# EAGLE board spikershield4.pcb (EAGLE 7.4.0)
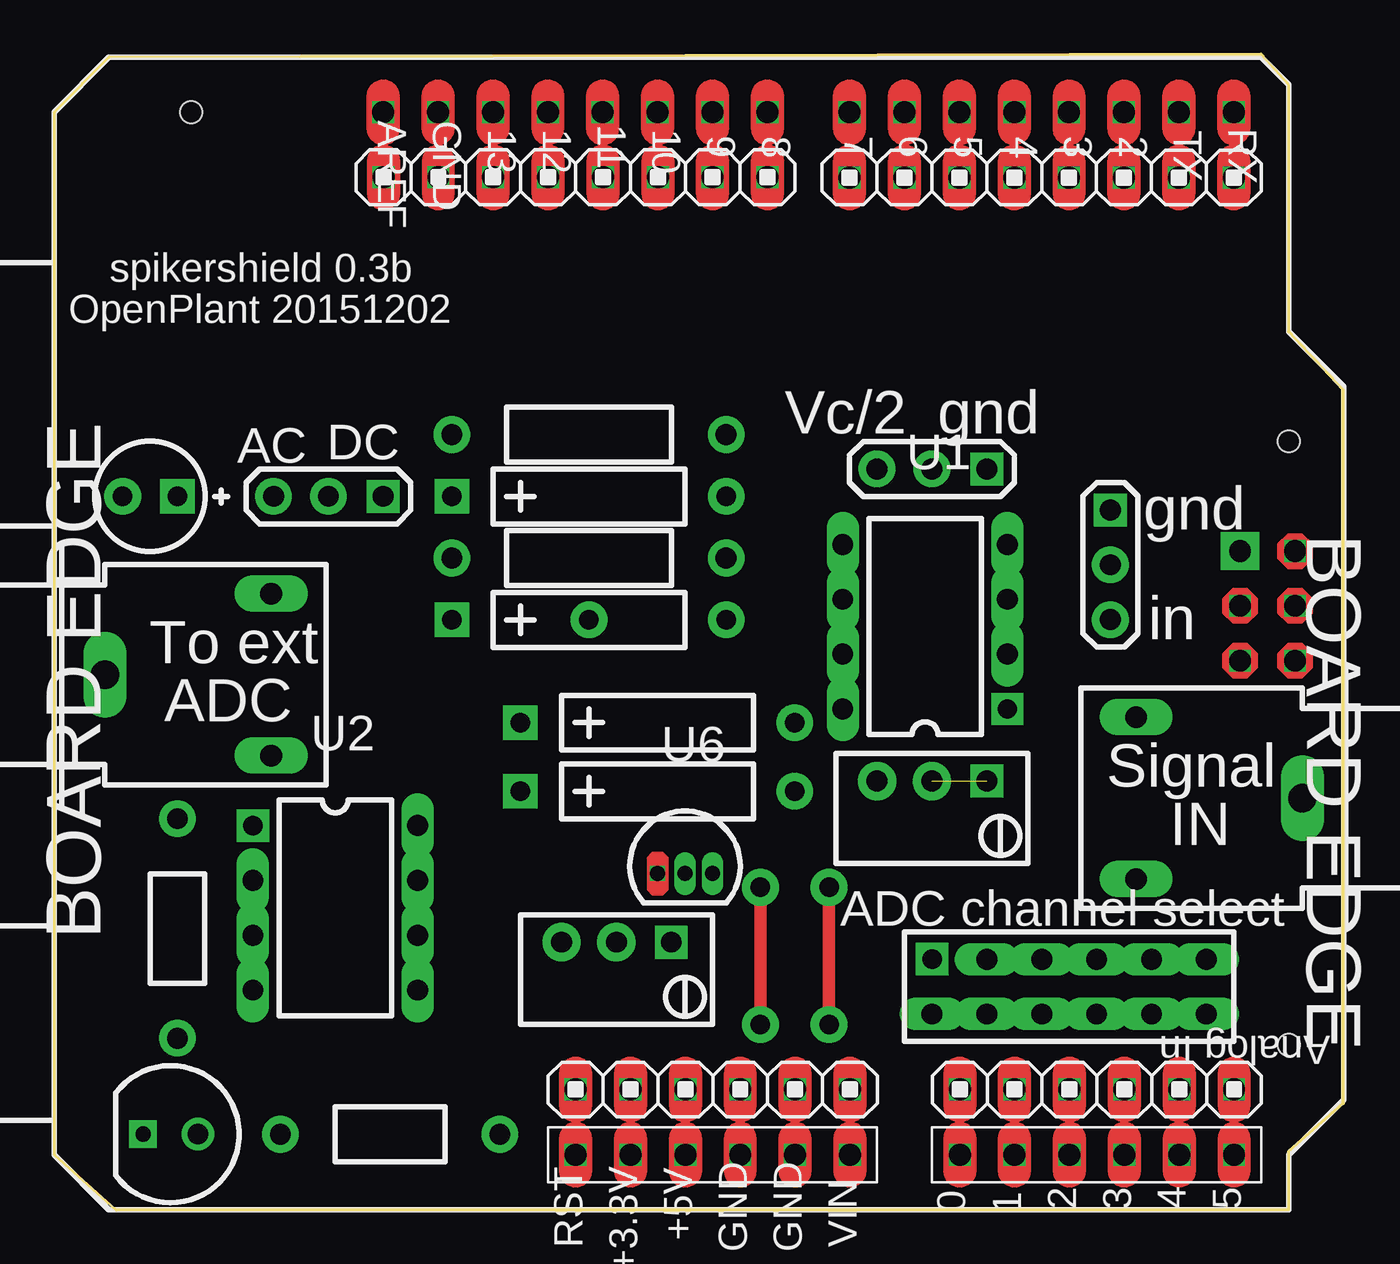
[diagram p0: board, top side]
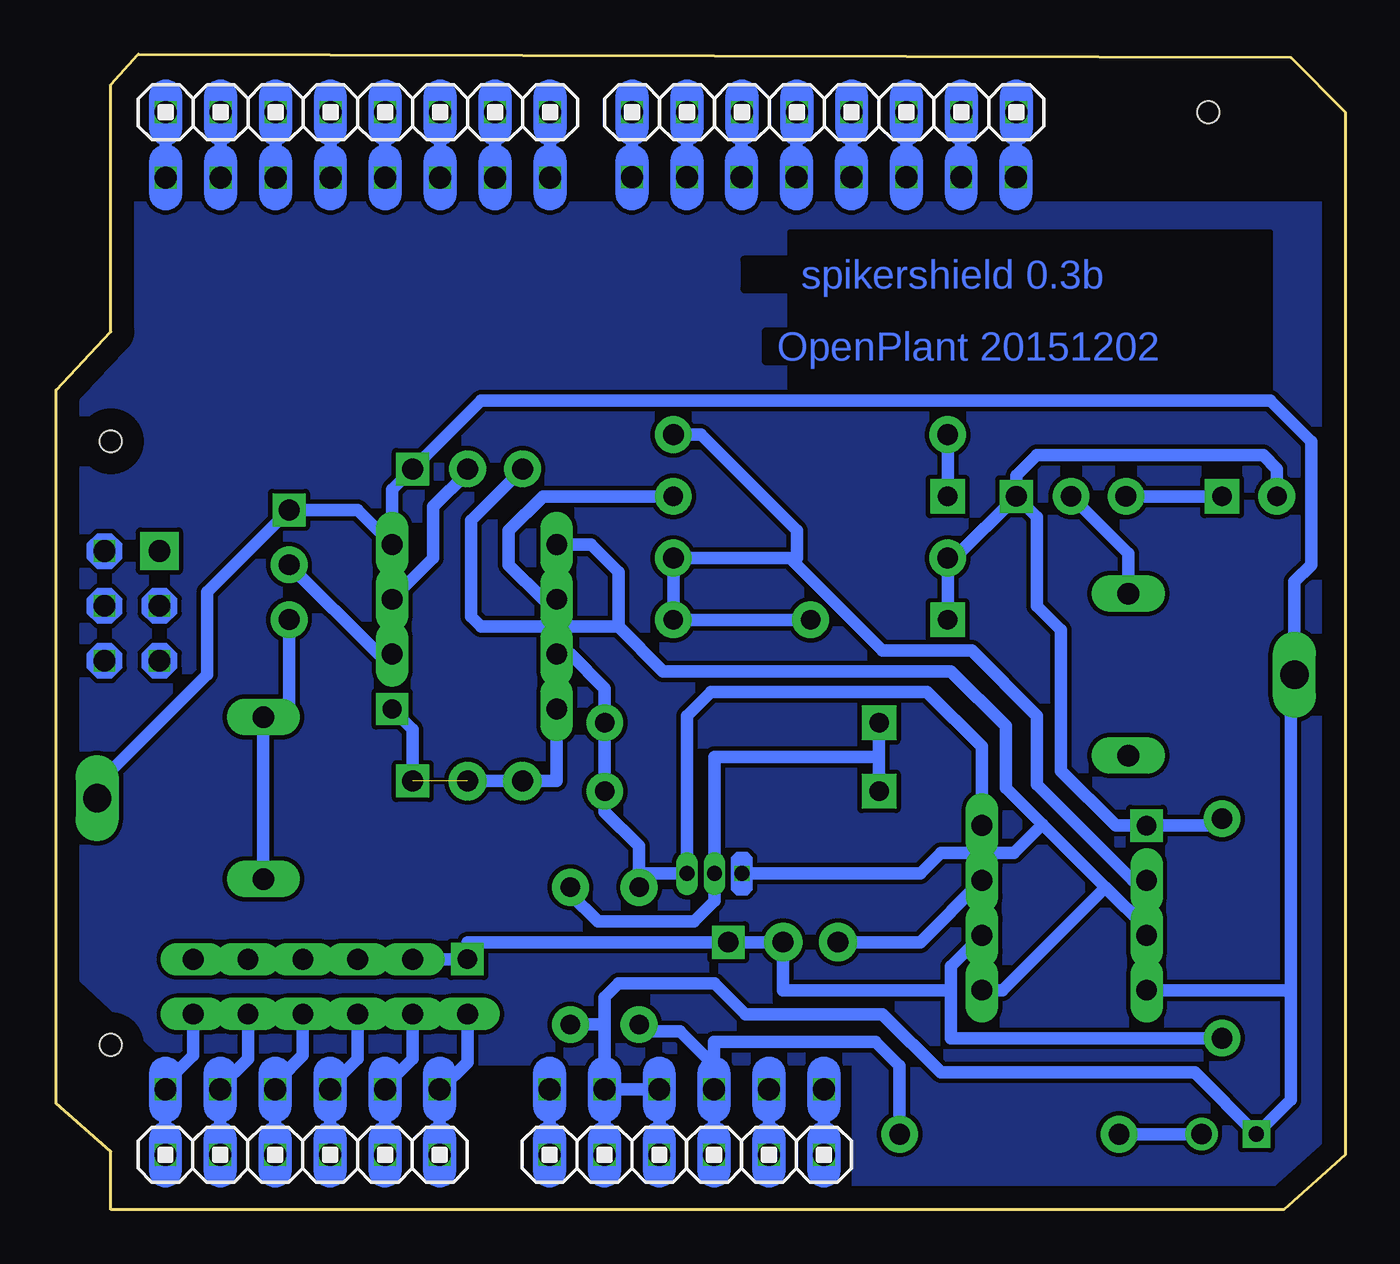
[diagram p1: board, bottom side, seen from below]

Size 59.69 x 53.5 mm. Coordinates in mm from the lower left corner, seen from the top.
Outline: 2.54,53.34 0,50.8 0,2.54 2.86,0 57.15,0 57.15,2.7 59.69,4.92 59.69,37.94 57.15,40.64 57.15,52.07 55.88,53.5 2.54,53.34
Copper layers (1*16): Top 0.035mm / dielectric 1.5mm / Bottom 0.035mm
Design rules "spikershield4": minimum track width 10mil, minimum drill 24mil, track to track 8mil, track to pad 8mil, pad to pad 8mil, via to via 8mil, smd to smd 8mil, copper to edge 40mil, drill to drill 8mil, minimum pad ring 0mil, minimum via ring 0mil, stop-mask expansion 4mil, vias tented up to drill 0mil, thermal gap 10mil

## Footprints (pad centres in the part's own frame; a part is rotated, then mirrored left to right if it is on the bottom)
CAP500AP_0PRIMARY = drill 0.9 pad 1.7: 1 6.325,0 | drill 0.9 pad 1.6 square: 2 -6.375,0
CAP100RP_1PRIMARY = drill 0.9 pad 1.6 square: 1 -0.74,0 | drill 0.9 pad 1.7: 2 1.8,0
LED_2PRIMARY = drill 0.95 pad 1.5: 1 0.952,0 | drill 0.711 pad 1.27 square: 2 -1.588,0
COMP_3PRIMARY = hole 1: 0,0
COMP_4PRIMARY = hole 1: 0,0
COMP_5PRIMARY = hole 1: 0,0
1X08_6PRIMARY = drill 1.016 pad 0.762 square: 1 -8.89,0; 2 -6.35,0; 3 -3.81,0; 4 -1.27,0; 5 1.27,0; 6 3.81,0; 7 6.35,0; 8 8.89,0
JUMPER_3_7PRIMARY = drill 0.965 pad 1.524 square: 1 -2.54,0 | drill 0.965 pad 1.7: 2 0,0; 3 2.54,0
RCA_JACK_8PRIMARY = drill 1.3 pad 2 long: 1 -0.365,0 | drill 1 pad 1.7 long: 2 7.325,3.75; 3 7.325,-3.75
1X06_9PRIMARY = drill 1.016 pad 0.762 square: 1 -6.35,0; 2 -3.81,0; 3 -1.27,0; 4 1.27,0; 5 3.81,0; 6 6.35,0
COMP_10PRIMARY = drill 1 pad 0.821 square: 1 0,0
COMP_11PRIMARY = drill 1 pad 0.821 square: 1 0,0
COMP_12PRIMARY = drill 1 pad 1.778 square: 1 0,0
COMP_13PRIMARY = drill 1 pad 0.821 square: 1 0,0
COMP_14PRIMARY = drill 1 pad 0.821 square: 1 0,0
COMP_15PRIMARY = drill 1 pad 0.821 square: 1 0,0
PAD_16PRIMARY = drill 0.9 pad 1.7: 1 0,0
1X06_17PRIMARY = drill 1.016 pad 0.762 square: 1 -6.35,0; 2 -3.81,0; 3 -1.27,0; 4 1.27,0; 5 3.81,0; 6 6.35,0
POT3T_18PRIMARY = drill 0.965 pad 1.524 square: 1 -1.27,2.54 | drill 0.965 pad 1.778: 2 -1.27,0; 3 -1.27,-2.54
RES400_19PRIMARY = drill 0.965 pad 1.7: 1 5.08,0; 2 -5.08,0
RES500_20PRIMARY = drill 0.965 pad 1.7: 1 6.35,0; 2 -6.35,0
RES500_21PRIMARY = drill 0.965 pad 1.7: 1 6.35,0; 2 -6.35,0
AD623AN_22PRIMARY = drill 0.9 pad 1.5 square: 1 -3.81,3.81 | drill 0.965 pad 1.5 long: 2 -3.81,1.27; 3 -3.81,-1.27; 4 -3.81,-3.81; 5 3.81,-3.81; 6 3.81,-1.27; 7 3.81,1.27; 8 3.81,3.81
AD623AN_23PRIMARY = drill 0.9 pad 1.5 square: 1 -3.81,3.81 | drill 0.965 pad 1.5 long: 2 -3.81,1.27; 3 -3.81,-1.27; 4 -3.81,-3.81; 5 3.81,-3.81; 6 3.81,-1.27; 7 3.81,1.27; 8 3.81,3.81
HDR-2X6_24PRIMARY = drill 0.9 pad 1.5 square: 1 -6.35,1.27 | drill 0.965 pad 1.5 long: 2 -6.35,-1.27; 3 -3.81,1.27; 4 -3.81,-1.27; 5 -1.27,1.27; 6 -1.27,-1.27; 7 1.27,1.27; 8 1.27,-1.27; 9 3.81,1.27; 10 3.81,-1.27; 11 6.35,1.27; 12 6.35,-1.27
TLE2426*LP_25PRIMARY = drill 0.7 pad 0.5 square: 1 -1.27,-0.775 | drill 0.7 pad 1 long: 2 0,-0.775; 3 1.27,-0.775

## Placement (x,y rotation side)
C3  10uF  [CAP500AP_0PRIMARY]  24.79,33.02 0 top
C4  360pF  [CAP500AP_0PRIMARY]  24.79,27.3 0 top
C5  [CAP100RP_1PRIMARY]  4.97,33.02 180 top
C6  1uF  [CAP500AP_0PRIMARY]  27.97,22.54 0 top
C7  10nF  [CAP500AP_0PRIMARY]  27.97,19.37 0 top
D1  [LED_2PRIMARY]  5.72,3.49 0 top
HOLE1  [COMP_3PRIMARY]  57.15,7.62 0 top
HOLE2  [COMP_4PRIMARY]  6.35,50.8 0 top
HOLE3  [COMP_5PRIMARY]  57.15,35.57 0 top
J1  [1X08_6PRIMARY]  45.72,50.8 180 bottom
J2  [JUMPER_3_7PRIMARY]  40.64,34.29 180 top
J3  [RCA_JACK_8PRIMARY]  57.42,19.05 180 top
J4  [RCA_JACK_8PRIMARY]  2.73,24.77 0 top
J5  [JUMPER_3_7PRIMARY]  48.9,29.85 270 top
J6  [1X08_6PRIMARY]  24.13,50.8 180 bottom
J7  [1X08_6PRIMARY]  24.14,47.79 180 top
J8  [1X06_9PRIMARY]  48.28,2.54 0 bottom
J9  [1X06_9PRIMARY]  30.5,2.54 0 bottom
J11  [JUMPER_3_7PRIMARY]  12.7,33.02 180 top
J12  [1X08_6PRIMARY]  45.72,47.78 180 top
J13  [1X06_9PRIMARY]  48.28,5.56 0 top
PAD1  [COMP_10PRIMARY]  57.44,27.95 0 top
PAD2  [COMP_11PRIMARY]  54.9,27.95 0 top
PAD3  [COMP_12PRIMARY]  54.9,30.49 0 top
PAD4  [COMP_13PRIMARY]  57.44,30.49 0 top
PAD5  [COMP_14PRIMARY]  57.44,25.41 0 top
PAD6  [COMP_15PRIMARY]  54.9,25.41 0 top
PAD19  [PAD_16PRIMARY]  32.7,14.92 0 bottom
PAD20  [PAD_16PRIMARY]  32.7,8.57 0 bottom
PAD21  [PAD_16PRIMARY]  35.88,14.92 0 bottom
PAD22  [PAD_16PRIMARY]  35.88,8.57 0 bottom
PAD23  [PAD_16PRIMARY]  24.77,27.3 0 top
POWER1  [1X06_17PRIMARY]  30.5,5.56 0 top
R1  [POT3T_18PRIMARY]  40.64,18.57 270 top
R2  390  [RES400_19PRIMARY]  15.56,3.49 0 top
R5  2.2M  [RES500_20PRIMARY]  24.77,30.16 0 top
R6  100k  [RES500_21PRIMARY]  24.77,35.88 0 top
R7  1k  [RES400_19PRIMARY]  5.72,13.02 270 top
R8  5k  [POT3T_18PRIMARY]  26.03,11.11 270 top
U1  [AD623AN_22PRIMARY]  40.32,26.99 180 top
U2  [AD623AN_23PRIMARY]  13.02,13.97 0 top
U4  [HDR-2X6_24PRIMARY]  47,10.32 0 top
U6  [TLE2426*LP_25PRIMARY]  29.21,16.33 0 top

## Library data of the parts
C3-C7 D1 HOLE1-HOLE3 J1-J9 J11-J13 PAD1-PAD6 PAD19-PAD23 POWER1 R1 R2 R5-R8 U4 U6 = spikershield4
U1 U2 = spikershield4; DATASHEET: http://www.analog.com/static/imported-files/data_sheets/AD623.pdf

## Nets
NET_0: C6.2 C7.2 D1.2 J2.1 J3.1 J4.1 J5.1 J9.2 J9.3 PAD21.1 PAD22.1 POWER1.4 POWER1.5 U1.4 U2.4 U6.2
NET_1: J2.2 U1.3
NET_2: D1.1 R2.2
NET_3: J2.3 U1.5 U2.3 U2.5 U6.1
NET_4: R1.1 R1.2 R1.3 U1.1 U1.8
NET_5: R8.3 U2.7
NET_6: R7.1 R8.1 R8.2 U2.6 U4.1 U4.3 U4.5 U4.7 U4.9 U4.11
NET_7: J3.2 J3.3 J5.3
NET_8: J5.2 U1.2
NET_9: C3.1 U1.6
NET_10: C6.1 C7.1 J9.4 PAD19.1 PAD20.1 POWER1.3 R2.1 U1.7 U2.8 U6.3
NET_11: C4.1 PAD23.1 R5.1 R6.1 U2.2
NET_12: J1.6 J12.3
NET_13: J8.6 J13.1 U4.2
NET_14: J6.2 J7.7
NET_15: J8.5 J13.2 U4.4
NET_16: J8.4 J13.3 U4.6
NET_17: J8.3 J13.4 U4.8
NET_18: J8.2 J13.5 U4.10
NET_19: J9.6 POWER1.1
NET_20: J9.5 POWER1.2
NET_21: J9.1 POWER1.6
NET_22: J8.1 J13.6 U4.12
NET_23: J4.2 J11.2
NET_24: C4.2 C5.2 J11.1 R5.2 R7.2 U2.1
NET_25: J1.8 J12.1
NET_26: J1.7 J12.2
NET_27: C3.2 R6.2
NET_28: J1.5 J12.4
NET_29: J1.4 J12.5
NET_30: J1.3 J12.6
NET_31: J1.2 J12.7
NET_32: J1.1 J12.8
NET_33: J6.8 J7.1
NET_34: J6.7 J7.2
NET_35: J6.6 J7.3
NET_36: J6.5 J7.4
NET_37: J6.4 J7.5
NET_38: J6.3 J7.6
NET_39: C5.1 J11.3
NET_40: J6.1 J7.8

## Tracks (layer width: path | path; a pad name or v marks a point on that pad's centre or on a via)
NET_0
  Top 0.584: PAD22.1 PAD21.1
  Bottom 0.584: J3.1 57.78,19.68 52.7,24.77 52.7,28.59 J5.1 45.73,32.39 U1.4 44.13,33.34 J2.1 40,37.47 3.49,37.47 1.59,35.56 1.59,29.84 2.36,29.07 J4.1 2.54,24.59 2.54,10.16 | U2.4 2.54,10.16 | 2.54,10.16 2.54,5.08 D1.2 6.98,6.35 18.73,6.35 21.43,9.05 27.78,9.05 29.21,10.48 33.65,10.48 34.31,9.83 34.31,8.57 | POWER1.5 POWER1.4 J9.3 | J9.2 POWER1.5 | POWER1.5 34.31,8.57 | PAD22.1 34.31,8.57 | 21.59,20.95 C6.2 | C7.2 21.59,20.95 | 21.59,20.95 29.21,20.95 U6.2 29.21,14.29 30.16,13.34 34.61,13.34 35.88,14.6 PAD21.1
NET_1
  Bottom 0.584: J2.2 40.64,34.13 42.23,32.54 42.23,30.16 U1.3
NET_2
  Bottom 0.584: D1.1 R2.2
NET_3
  Bottom 0.584: J2.3 40.48,31.91 40.48,27.46 40,26.99 33.65,26.99 | 33.65,26.99 33.65,29.53 34.92,30.8 U1.5 | 33.65,26.99 31.59,24.92 18.26,24.92 15.72,22.38 15.72,19.53 14.02,17.83 | 14.02,17.83 11.11,14.92 | 11.11,14.92 9.21,13.02 U2.3 | U2.5 15.87,10.16 11.11,14.92 | U6.1 19.68,15.56 18.73,16.51 15.35,16.51 14.02,17.83
NET_4  (1 unrouted)
  Bottom 0.584: R1.2 R1.3 36.51,19.84 U1.8 | R1.1 43.18,22.22 U1.1
NET_5
  Bottom 0.584: R8.3 19.68,12.38 U2.7
NET_6
  Bottom 0.584: R7.1 18.26,7.94 18.26,10.16 | 18.26,10.16 18.26,11.27 U2.6 | U4.11 U4.9 U4.7 U4.5 U4.3 U4.1 40.65,12.38 R8.1 R8.2 26.03,10.16 18.26,10.16
NET_7
  Bottom 0.584: J5.3 48.9,23.33 49.43,22.8 J3.3 J3.2
NET_8
  Bottom 0.584: U1.2 44.77,25.72 J5.2
NET_9
  Bottom 0.584: U1.6 37.15,28.26 38.73,29.84 38.73,31.43 37.15,33.02 C3.1
NET_10
  Top 0.584: PAD20.1 PAD19.1
  Bottom 0.584: 32.7,15.56 U6.3 30.48,22.86 29.37,23.97 19.37,23.97 16.83,21.43 U2.8 | 32.7,15.56 32.7,16.83 34.29,18.41 C7.1 C6.1 34.29,24.13 35.88,25.72 U1.7 | PAD19.1 32.7,15.56 | 29.23,6.68 29.23,7.78 21.75,7.78 20.64,6.67 R2.1 | 29.23,6.68 POWER1.3 J9.4 | 29.23,6.68 30.8,8.25 32.7,8.25 PAD20.1
NET_11
  Bottom 0.584: 25.72,30.16 R5.1 C4.1 PAD23.1 | 25.72,30.16 25.4,30.16 25.4,31.43 29.84,35.88 R6.1 | U2.2 9.84,15.24 14.29,19.68 14.29,22.86 17.3,25.88 21.43,25.88 25.72,30.16
NET_12
  Bottom 0.584: J12.3 J1.6
NET_13
  Bottom 0.584: U4.2 40.65,6.82 41.91,5.56 J13.1 J8.6
NET_14
  Bottom 0.584: J7.7 17.79,50.79 J6.2
NET_15
  Bottom 0.584: U4.4 43.19,6.98 44.29,5.87 44.29,5.56 J13.2 J8.5
NET_16
  Bottom 0.584: U4.6 45.73,6.98 47.01,5.7 J13.3 J8.4
NET_17
  Bottom 0.584: U4.8 48.27,7.14 49.37,6.03 49.37,5.56 J13.4 J8.3
NET_18
  Bottom 0.584: U4.10 50.81,6.98 52.09,5.7 J13.5 J8.2
NET_19
  Bottom 0.584: J9.6 POWER1.1
NET_20
  Bottom 0.584: J9.5 POWER1.2
NET_21
  Bottom 0.584: J9.1 POWER1.6
NET_22
  Bottom 0.584: U4.12 53.35,7.14 54.45,6.03 54.45,5.56 J13.6 J8.1
NET_23
  Bottom 0.584: J4.2 10.05,30.37 J11.2
NET_24
  Bottom 0.584: C4.2 R5.2 18.1,30.16 J11.1 | J11.1 14.29,32.07 14.29,27.94 13.18,26.83 13.18,20.32 10.64,17.78 U2.1 6.03,17.78 R7.2 | J11.1 15.24,33.97 14.29,34.92 3.81,34.92 3.17,34.29 C5.2
NET_25
  Bottom 0.584: J12.1 J1.8
NET_26
  Bottom 0.584: J12.2 J1.7
NET_27
  Bottom 0.584: R6.2 C3.2
NET_28
  Bottom 0.584: J12.4 J1.5
NET_29
  Bottom 0.584: J12.5 J1.4
NET_30
  Bottom 0.584: J12.6 J1.3
NET_31
  Bottom 0.584: J12.7 J1.2
NET_32
  Bottom 0.584: J12.8 J1.1
NET_33
  Bottom 0.584: J7.1 33.03,50.79 J6.8
NET_34
  Bottom 0.584: J7.2 30.49,50.79 J6.7
NET_35
  Bottom 0.584: J7.3 27.95,50.79 J6.6
NET_36
  Bottom 0.584: J7.4 25.41,50.79 J6.5
NET_37
  Bottom 0.584: J7.5 22.87,50.79 J6.4
NET_38
  Bottom 0.584: J7.6 20.33,50.79 J6.3
NET_39
  Bottom 0.584: J11.3 C5.1
NET_40
  Bottom 0.584: J7.8 15.25,50.79 J6.1
S$1
  cutout Bottom (no thermals): 3.49,45.24 25.72,45.24 25.72,38.26 3.49,38.26
S$2
  pour Bottom: 56.52,46.36 0.64,46.36 0.64,2.54 2.54,0.63 22.54,0.63 22.54,6.98 54.29,6.98 59.06,11.43 59.06,37.78 56.52,40.64

## Text on the board
Top: TOP - REMEMBER TO MIRROR
Bottom: spikershield 0.3b | OpenPlant 20151202
tPlace: 13 | 12 | 11 | 10 | 9 | 8 | 7 | 6 | 5 | 4 | 3 | 2 | GND | TX | RX | AREF | spikershield 0.3b | OpenPlant 20151202 | Vc/2 | gnd | AC | DC | gnd | in | To ext | ADC | Signal | IN | ADC channel select | Analog In | RST | +5V | GND | GND | 0 | 1 | 2 | 3 | 4 | 5 | +3.3V | VIN